# EAGLE board Tiny_Programmer-Panel-v13 (EAGLE 6.5.0), part 1 of 2
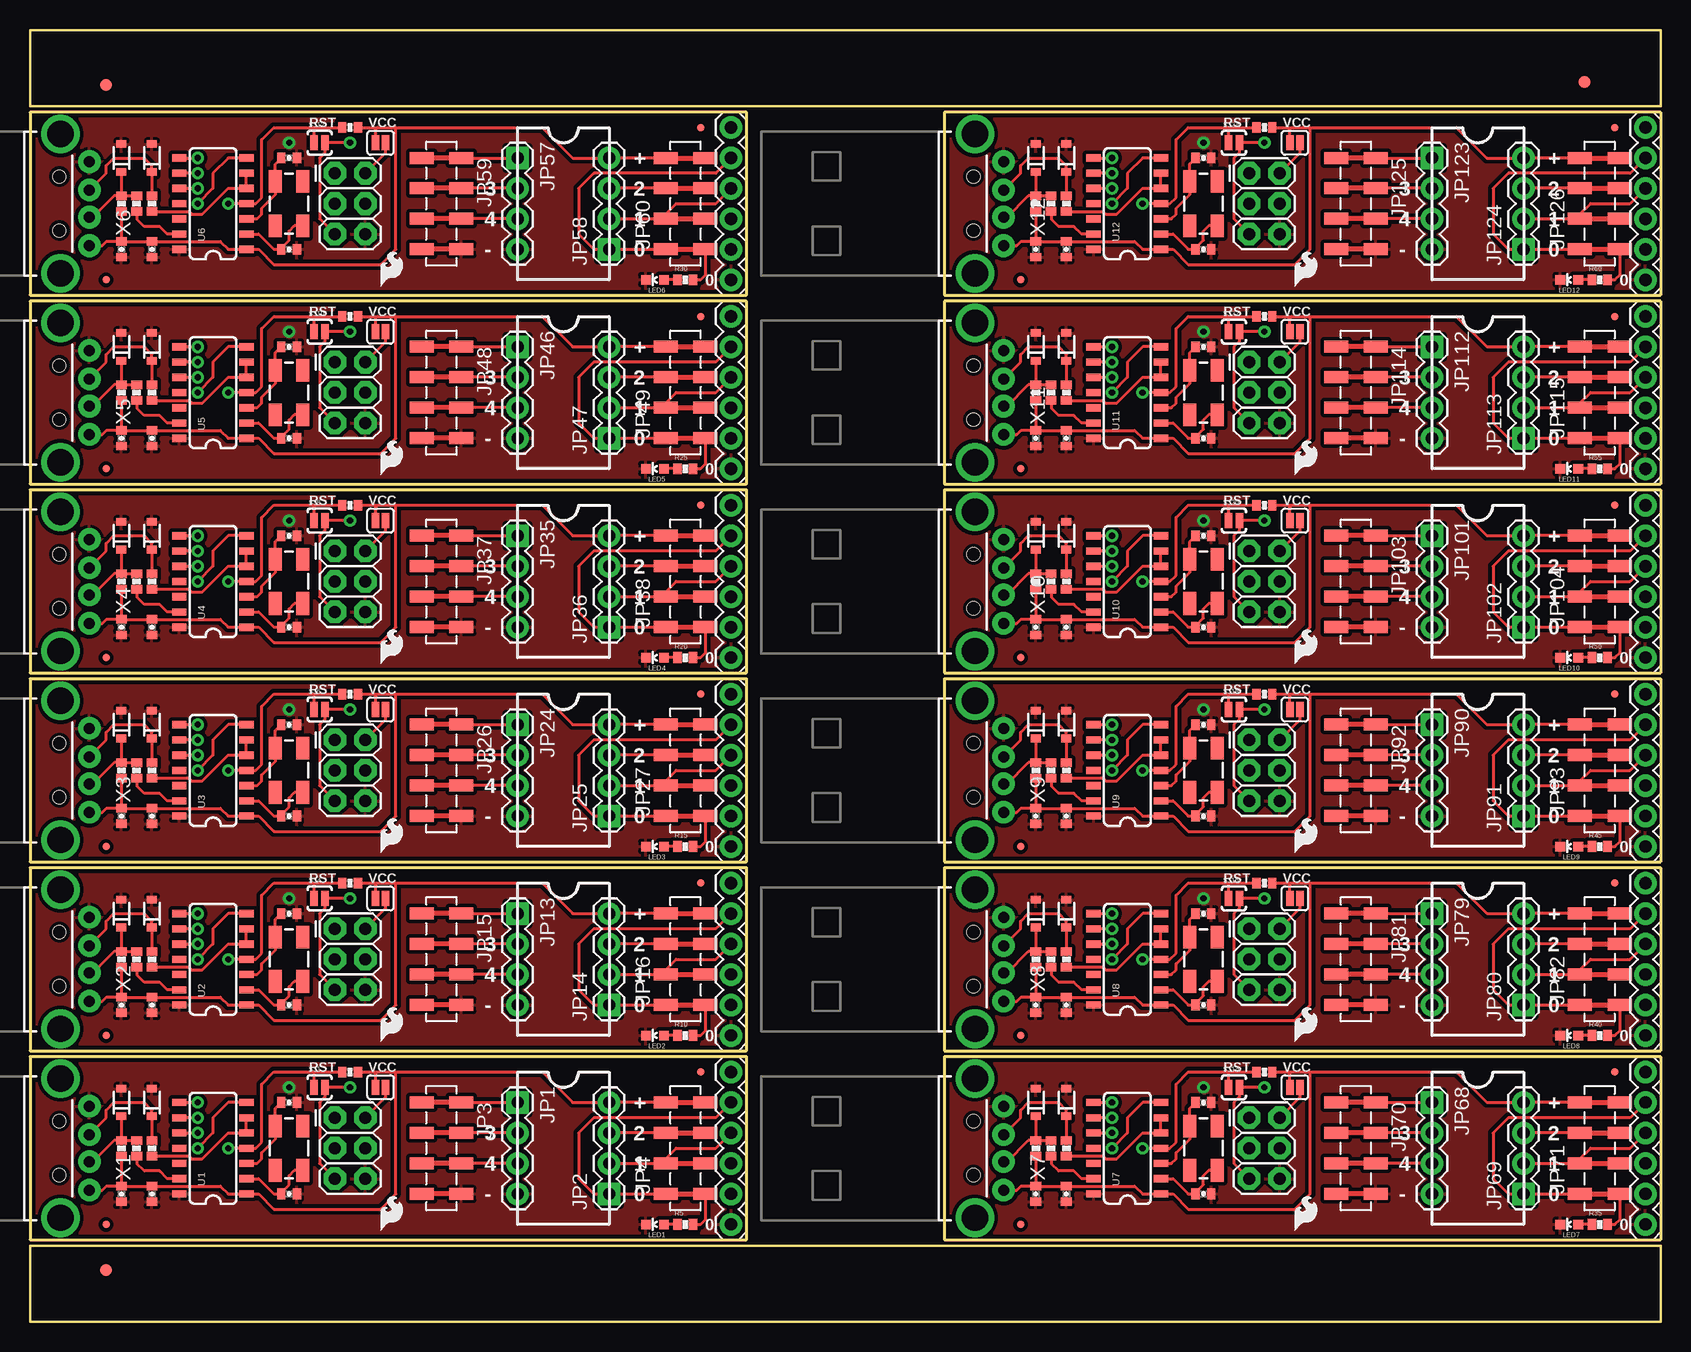
[diagram p0: board, top side]
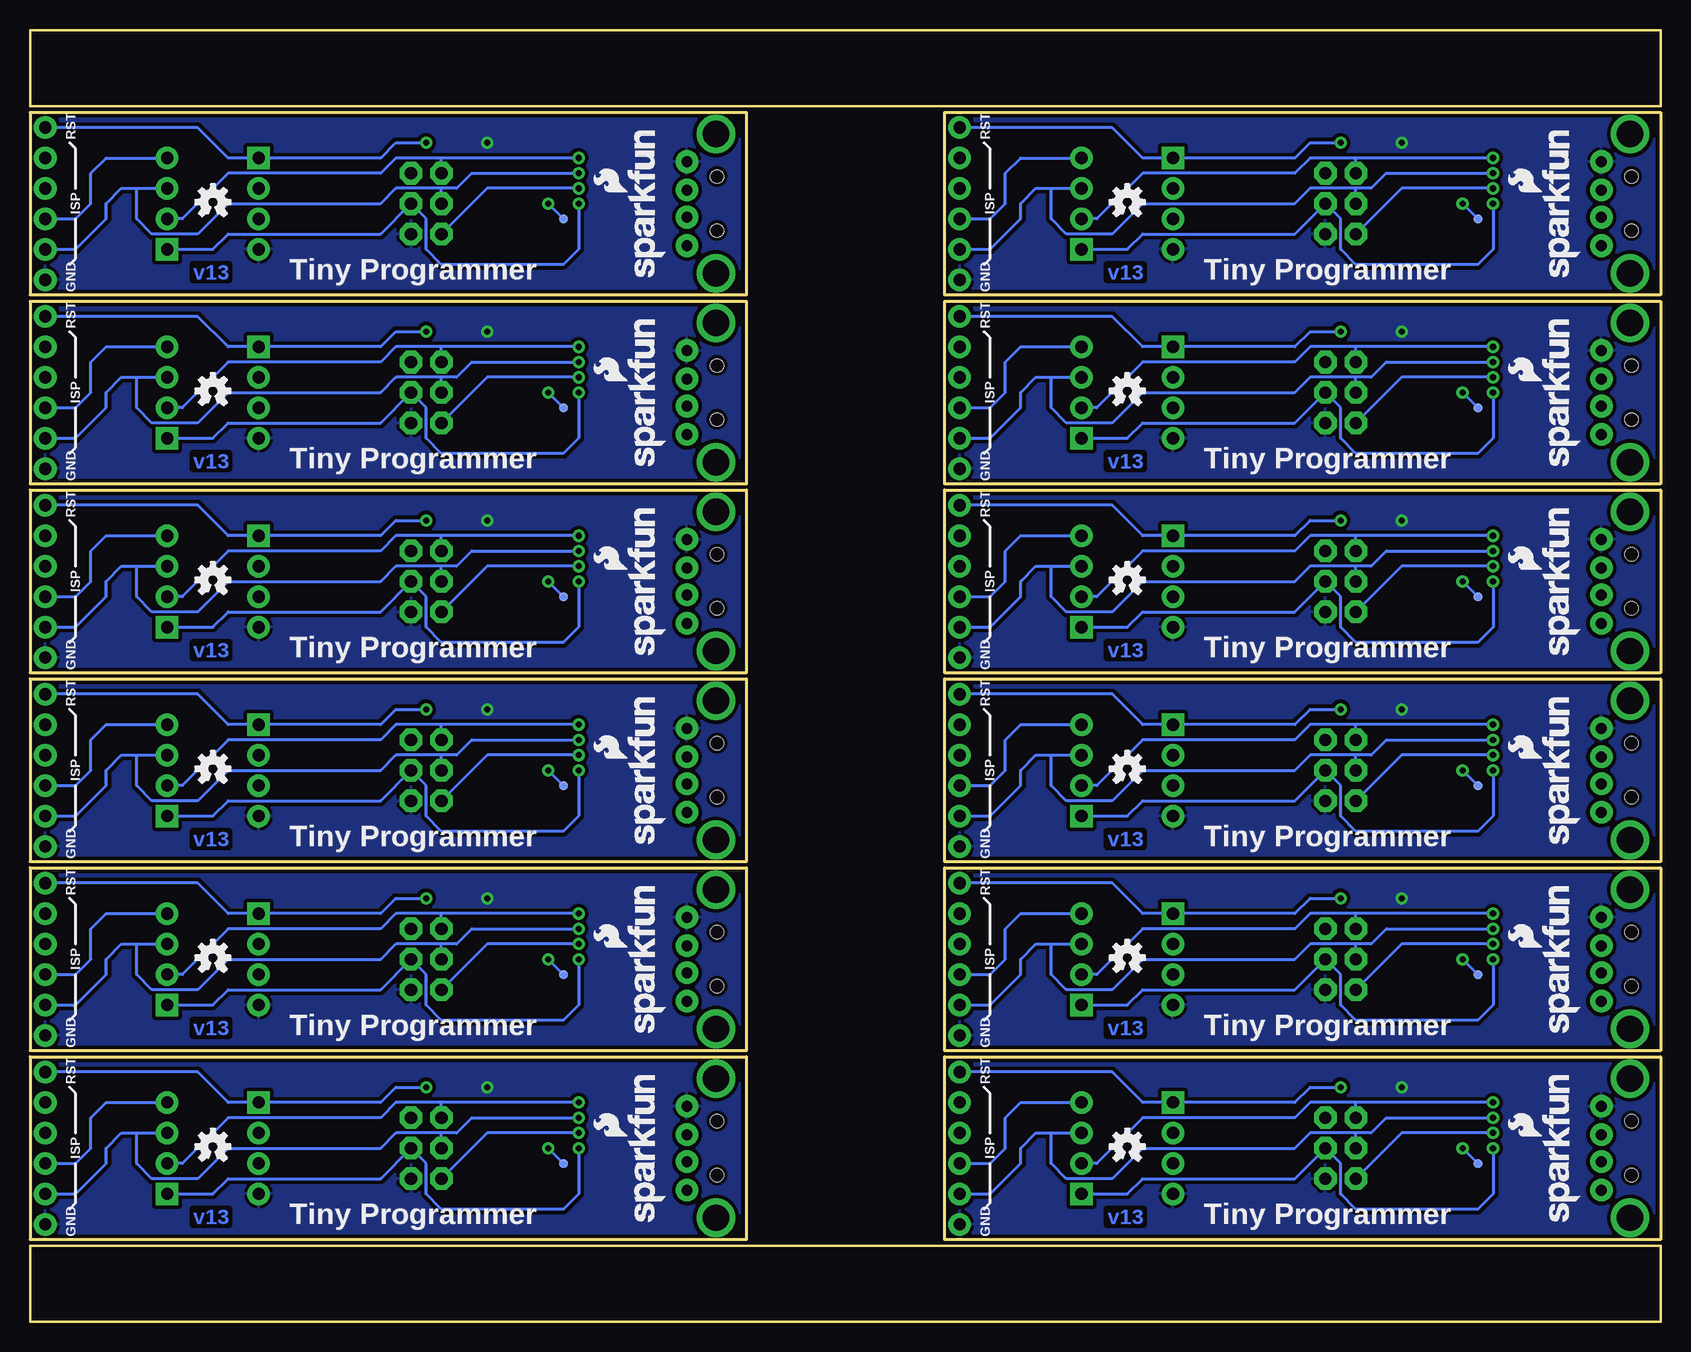
[diagram p1: board, bottom side, seen from below]

Size 135.89 x 107.7 mm. Coordinates in mm from the lower left corner, seen from the top.
Outline: 0,6.86 59.69,6.86 59.69,22.1 0,22.1 0,6.86
Outline: 0,22.61 59.69,22.61 59.69,37.85 0,37.85 0,22.61
Outline: 0,38.35 59.69,38.35 59.69,53.59 0,53.59 0,38.35
Outline: 0,54.1 59.69,54.1 59.69,69.34 0,69.34 0,54.1
Outline: 0,69.85 59.69,69.85 59.69,85.09 0,85.09 0,69.85
Outline: 0,85.6 59.69,85.6 59.69,100.84 0,100.84 0,85.6
Outline: 76.2,6.86 135.89,6.86 135.89,22.1 76.2,22.1 76.2,6.86
Outline: 76.2,22.61 135.89,22.61 135.89,37.85 76.2,37.85 76.2,22.61
Outline: 76.2,38.35 135.89,38.35 135.89,53.59 76.2,53.59 76.2,38.35
Outline: 76.2,54.1 135.89,54.1 135.89,69.34 76.2,69.34 76.2,54.1
Outline: 76.2,69.85 135.89,69.85 135.89,85.09 76.2,85.09 76.2,69.85
Outline: 76.2,85.6 135.89,85.6 135.89,100.84 76.2,100.84 76.2,85.6
Outline: 0,0 135.89,0 135.89,6.35 0,6.35 0,0
Outline: 135.89,107.7 0,107.7 0,101.35 135.89,101.35 135.89,107.7
Copper layers (1*16): Top 0.035mm / dielectric 1.5mm / Bottom 0.035mm
Design rules "default": minimum track width 8mil, minimum drill 20mil, track to track 8mil, track to pad 8mil, pad to pad 8mil, via to via 8mil, smd to smd 8mil, copper to edge 8mil, drill to drill 8mil, minimum pad ring 12mil, minimum via ring 10mil, stop-mask expansion 4mil, vias tented up to drill 20mil, thermal gap 10mil

## Footprints (pad centres in the part's own frame; a part is rotated, then mirrored left to right if it is on the bottom)
0402-CAP = smd 0.7 x 0.9: 1 -0.65,0; 2 0.65,0
SOD-323 = smd 0.63 x 0.83: 1 -1.15,0; 2 1.15,0
FIDUCIAL-1X2 = smd 1 x 1: 1 0,0
1X04 = drill 1.016 pad 1.88 square: 1 0,0 | drill 1.016 pad 1.88: 2 2.54,0; 3 5.08,0; 4 7.62,0
1X04_SMD_STRAIGHT_COMBO = smd 1 x 2: 1 0,-1.65; 1-2 0,1.65; 2 2.54,1.65; 2-2 2.54,-1.65; 3 5.08,-1.65; 3-2 5.08,1.65; 4 7.62,1.65; 4-2 7.62,-1.65
MICRO-FIDUCIAL = smd 0.635 x 0.635: 1 0,0
2X3 = drill 1.016 pad 1.88 octagon: 1 0,0; 2 0,2.54; 3 2.54,0; 4 2.54,2.54; 5 5.08,0; 6 5.08,2.54
1X06 = drill 1.016 pad 1.88: 1 0,0; 2 2.54,0; 3 5.08,0; 4 7.62,0; 5 10.16,0; 6 12.7,0
LED-0603 = smd 0.8 x 0.8: A 0,-0.75; C 0,0.75
CRYSTAL-SMD-5X3 = smd 1.9 x 1.1: 1 -1.85,-1.15; 2 1.85,-1.15; 3 1.85,1.15; 4 -1.85,1.15
0402-RES = smd 0.7 x 0.9: 1 -0.65,0; 2 0.65,0
SJ_2S-NO = smd 0.635 x 1.27: 1 -0.45,0; 2 0.45,0
SJ_2S = smd 0.635 x 1.27: 1 -0.412,0; 2 0.412,0
PAD.03X.03 = smd 0.762 x 0.762: P$1 0,0
SO14 = smd 0.6 x 1.2: 1 -3.81,-2.8; 2 -2.54,-2.8; 3 -1.27,-2.8; 4 0,-2.8; 5 1.27,-2.8; 6 2.54,-2.8; 7 3.81,-2.8; 8 3.81,2.8; 9 2.54,2.8; 10 1.27,2.8; 11 0,2.8; 12 -1.27,2.8; 13 -2.54,2.8; 14 -3.81,2.8
USB-A-H = drill 0.914 pad 1.88: D+ 2.4,1.127; D- 2.4,-1.127; GND 2.4,3.5; VBUS 2.4,-3.5 | drill 2.2: GND2 0,-5.8; GND3 0,5.8 | hole 1.1: -0.1,2.25; -0.1,-2.25

## Placement (x,y rotation side)
C1  0.1uF  [0402-CAP]  7.62,10.67 270 top
C2  18pF  [0402-CAP]  21.59,18.29 0 top
C3  10uF  [0402-CAP]  10.16,10.67 270 top
C4  18pF  [0402-CAP]  21.59,10.67 0 top
C5  0.1uF  [0402-CAP]  7.62,26.42 270 top
C6  10uF  [0402-CAP]  10.16,26.42 270 top
C7  18pF  [0402-CAP]  21.59,34.04 0 top
C8  18pF  [0402-CAP]  21.59,26.42 0 top
C9  0.1uF  [0402-CAP]  7.62,42.16 270 top
C10  10uF  [0402-CAP]  10.16,42.16 270 top
C11  18pF  [0402-CAP]  21.59,49.78 0 top
C12  18pF  [0402-CAP]  21.59,42.16 0 top
C13  0.1uF  [0402-CAP]  7.62,57.91 270 top
C14  10uF  [0402-CAP]  10.16,57.91 270 top
C15  18pF  [0402-CAP]  21.59,65.53 0 top
C16  18pF  [0402-CAP]  21.59,57.91 0 top
C17  0.1uF  [0402-CAP]  7.62,73.66 270 top
C18  10uF  [0402-CAP]  10.16,73.66 270 top
C19  18pF  [0402-CAP]  21.59,81.28 0 top
C20  18pF  [0402-CAP]  21.59,73.66 0 top
C21  0.1uF  [0402-CAP]  7.62,89.41 270 top
C22  10uF  [0402-CAP]  10.16,89.41 270 top
C23  18pF  [0402-CAP]  21.59,97.03 0 top
C24  18pF  [0402-CAP]  21.59,89.41 0 top
C25  0.1uF  [0402-CAP]  83.82,10.67 270 top
C26  10uF  [0402-CAP]  86.36,10.67 270 top
C27  18pF  [0402-CAP]  97.79,18.29 0 top
C28  18pF  [0402-CAP]  97.79,10.67 0 top
C29  0.1uF  [0402-CAP]  83.82,26.42 270 top
C30  10uF  [0402-CAP]  86.36,26.42 270 top
C31  18pF  [0402-CAP]  97.79,34.04 0 top
C32  18pF  [0402-CAP]  97.79,26.42 0 top
C33  0.1uF  [0402-CAP]  83.82,42.16 270 top
C34  10uF  [0402-CAP]  86.36,42.16 270 top
C35  18pF  [0402-CAP]  97.79,49.78 0 top
C36  18pF  [0402-CAP]  97.79,42.16 0 top
C37  0.1uF  [0402-CAP]  83.82,57.91 270 top
C38  10uF  [0402-CAP]  86.36,57.91 270 top
C39  18pF  [0402-CAP]  97.79,65.53 0 top
C40  18pF  [0402-CAP]  97.79,57.91 0 top
C41  0.1uF  [0402-CAP]  83.82,73.66 270 top
C42  10uF  [0402-CAP]  86.36,73.66 270 top
C43  18pF  [0402-CAP]  97.79,81.28 0 top
C44  18pF  [0402-CAP]  97.79,73.66 0 top
C45  0.1uF  [0402-CAP]  83.82,89.41 270 top
C46  10uF  [0402-CAP]  86.36,89.41 270 top
C47  18pF  [0402-CAP]  97.79,97.03 0 top
C48  18pF  [0402-CAP]  97.79,89.41 0 top
D1  3.3V  [SOD-323]  10.16,18.29 90 top
D2  3.3V  [SOD-323]  7.62,18.29 90 top
D3  3.3V  [SOD-323]  10.16,34.04 90 top
D4  3.3V  [SOD-323]  7.62,34.04 90 top
D5  3.3V  [SOD-323]  10.16,49.78 90 top
D6  3.3V  [SOD-323]  7.62,49.78 90 top
D7  3.3V  [SOD-323]  10.16,65.53 90 top
D8  3.3V  [SOD-323]  7.62,65.53 90 top
D9  3.3V  [SOD-323]  10.16,81.28 90 top
D10  3.3V  [SOD-323]  7.62,81.28 90 top
D11  3.3V  [SOD-323]  10.16,97.03 90 top
D12  3.3V  [SOD-323]  7.62,97.03 90 top
D13  3.3V  [SOD-323]  86.36,18.29 90 top
D14  3.3V  [SOD-323]  83.82,18.29 90 top
D15  3.3V  [SOD-323]  86.36,34.04 90 top
D16  3.3V  [SOD-323]  83.82,34.04 90 top
D17  3.3V  [SOD-323]  86.36,49.78 90 top
D18  3.3V  [SOD-323]  83.82,49.78 90 top
D19  3.3V  [SOD-323]  86.36,65.53 90 top
D20  3.3V  [SOD-323]  83.82,65.53 90 top
D21  3.3V  [SOD-323]  86.36,81.28 90 top
D22  3.3V  [SOD-323]  83.82,81.28 90 top
D23  3.3V  [SOD-323]  86.36,97.03 90 top
D24  3.3V  [SOD-323]  83.82,97.03 90 top
E$1  [FIDUCIAL-1X2]  6.35,4.32 270 top
E$3  [FIDUCIAL-1X2]  129.54,103.38 90 top
E$4  [FIDUCIAL-1X2]  6.35,103.12 270 top
JP1  [1X04]  40.64,18.29 270 top
JP2  [1X04]  48.26,10.67 90 top
JP3  [1X04_SMD_STRAIGHT_COMBO]  34.29,18.29 270 top
JP4  [1X04_SMD_STRAIGHT_COMBO]  54.61,10.67 90 top
JP5  LOGO-SFENW2  [SFE-NEW-WEB]  6.73,8.38 90 bottom
JP6  LOGO-SFESK  [SFE-LOGO-FLAME]  29.21,7.62 0 top
JP7  FIDUCIALUFIDUCIAL  [MICRO-FIDUCIAL]  6.35,8.13 0 top
JP8  FIDUCIALUFIDUCIAL  [MICRO-FIDUCIAL]  55.88,20.83 0 top
JP9  [2X3]  25.4,17.02 270 top
JP10  [2X3]  25.4,32.77 270 top
JP11  LOGO-SFESK  [SFE-LOGO-FLAME]  9.91,15.49 90 bottom
JP12  [1X06]  58.42,20.83 270 top
JP13  [1X04]  40.64,34.04 270 top
JP14  [1X04]  48.26,26.42 90 top
JP15  [1X04_SMD_STRAIGHT_COMBO]  34.29,34.04 270 top
JP16  [1X04_SMD_STRAIGHT_COMBO]  54.61,26.42 90 top
JP17  LOGO-SFENW2  [SFE-NEW-WEB]  6.73,24.13 90 bottom
JP18  LOGO-SFESK  [SFE-LOGO-FLAME]  29.21,23.37 0 top
JP19  FIDUCIALUFIDUCIAL  [MICRO-FIDUCIAL]  6.35,23.88 0 top
JP20  FIDUCIALUFIDUCIAL  [MICRO-FIDUCIAL]  55.88,36.58 0 top
JP21  LOGO-SFESK  [SFE-LOGO-FLAME]  9.91,31.24 90 bottom
JP22  [1X06]  58.42,36.58 270 top
JP23  [2X3]  25.4,48.51 270 top
JP24  [1X04]  40.64,49.78 270 top
JP25  [1X04]  48.26,42.16 90 top
JP26  [1X04_SMD_STRAIGHT_COMBO]  34.29,49.78 270 top
JP27  [1X04_SMD_STRAIGHT_COMBO]  54.61,42.16 90 top
JP28  LOGO-SFENW2  [SFE-NEW-WEB]  6.73,39.88 90 bottom
JP29  LOGO-SFESK  [SFE-LOGO-FLAME]  29.21,39.12 0 top
JP30  FIDUCIALUFIDUCIAL  [MICRO-FIDUCIAL]  6.35,39.62 0 top
JP31  FIDUCIALUFIDUCIAL  [MICRO-FIDUCIAL]  55.88,52.32 0 top
JP32  LOGO-SFESK  [SFE-LOGO-FLAME]  9.91,46.99 90 bottom
JP33  [1X06]  58.42,52.32 270 top
JP34  [2X3]  25.4,64.26 270 top
JP35  [1X04]  40.64,65.53 270 top
JP36  [1X04]  48.26,57.91 90 top
JP37  [1X04_SMD_STRAIGHT_COMBO]  34.29,65.53 270 top
JP38  [1X04_SMD_STRAIGHT_COMBO]  54.61,57.91 90 top
JP39  LOGO-SFENW2  [SFE-NEW-WEB]  6.73,55.63 90 bottom
JP40  LOGO-SFESK  [SFE-LOGO-FLAME]  29.21,54.86 0 top
JP41  FIDUCIALUFIDUCIAL  [MICRO-FIDUCIAL]  6.35,55.37 0 top
JP42  FIDUCIALUFIDUCIAL  [MICRO-FIDUCIAL]  55.88,68.07 0 top
JP43  LOGO-SFESK  [SFE-LOGO-FLAME]  9.91,62.74 90 bottom
JP44  [1X06]  58.42,68.07 270 top
JP45  [2X3]  25.4,80.01 270 top
JP46  [1X04]  40.64,81.28 270 top
JP47  [1X04]  48.26,73.66 90 top
JP48  [1X04_SMD_STRAIGHT_COMBO]  34.29,81.28 270 top
JP49  [1X04_SMD_STRAIGHT_COMBO]  54.61,73.66 90 top
JP50  LOGO-SFENW2  [SFE-NEW-WEB]  6.73,71.37 90 bottom
JP51  LOGO-SFESK  [SFE-LOGO-FLAME]  29.21,70.61 0 top
JP52  FIDUCIALUFIDUCIAL  [MICRO-FIDUCIAL]  6.35,71.12 0 top
JP53  FIDUCIALUFIDUCIAL  [MICRO-FIDUCIAL]  55.88,83.82 0 top
JP54  LOGO-SFESK  [SFE-LOGO-FLAME]  9.91,78.49 90 bottom
JP55  [1X06]  58.42,83.82 270 top
JP56  [2X3]  25.4,95.76 270 top
JP57  [1X04]  40.64,97.03 270 top
JP58  [1X04]  48.26,89.41 90 top
JP59  [1X04_SMD_STRAIGHT_COMBO]  34.29,97.03 270 top
JP60  [1X04_SMD_STRAIGHT_COMBO]  54.61,89.41 90 top
JP61  LOGO-SFENW2  [SFE-NEW-WEB]  6.73,87.12 90 bottom
JP62  LOGO-SFESK  [SFE-LOGO-FLAME]  29.21,86.36 0 top
JP63  FIDUCIALUFIDUCIAL  [MICRO-FIDUCIAL]  6.35,86.87 0 top
JP64  FIDUCIALUFIDUCIAL  [MICRO-FIDUCIAL]  55.88,99.57 0 top
JP65  LOGO-SFESK  [SFE-LOGO-FLAME]  9.91,94.23 90 bottom
JP66  [1X06]  58.42,99.57 270 top
JP67  [2X3]  101.6,17.02 270 top
JP68  [1X04]  116.84,18.29 270 top
JP69  [1X04]  124.46,10.67 90 top
JP70  [1X04_SMD_STRAIGHT_COMBO]  110.49,18.29 270 top
JP71  [1X04_SMD_STRAIGHT_COMBO]  130.81,10.67 90 top
JP72  LOGO-SFENW2  [SFE-NEW-WEB]  82.93,8.38 90 bottom
JP73  LOGO-SFESK  [SFE-LOGO-FLAME]  105.41,7.62 0 top
JP74  FIDUCIALUFIDUCIAL  [MICRO-FIDUCIAL]  82.55,8.13 0 top
JP75  FIDUCIALUFIDUCIAL  [MICRO-FIDUCIAL]  132.08,20.83 0 top
JP76  LOGO-SFESK  [SFE-LOGO-FLAME]  86.11,15.49 90 bottom
JP77  [1X06]  134.62,20.83 270 top
JP78  [2X3]  101.6,32.77 270 top
JP79  [1X04]  116.84,34.04 270 top
JP80  [1X04]  124.46,26.42 90 top
JP81  [1X04_SMD_STRAIGHT_COMBO]  110.49,34.04 270 top
JP82  [1X04_SMD_STRAIGHT_COMBO]  130.81,26.42 90 top
JP83  LOGO-SFENW2  [SFE-NEW-WEB]  82.93,24.13 90 bottom
JP84  LOGO-SFESK  [SFE-LOGO-FLAME]  105.41,23.37 0 top
JP85  FIDUCIALUFIDUCIAL  [MICRO-FIDUCIAL]  82.55,23.88 0 top
JP86  FIDUCIALUFIDUCIAL  [MICRO-FIDUCIAL]  132.08,36.58 0 top
JP87  LOGO-SFESK  [SFE-LOGO-FLAME]  86.11,31.24 90 bottom
JP88  [1X06]  134.62,36.58 270 top
JP89  [2X3]  101.6,48.51 270 top
JP90  [1X04]  116.84,49.78 270 top
JP91  [1X04]  124.46,42.16 90 top
JP92  [1X04_SMD_STRAIGHT_COMBO]  110.49,49.78 270 top
JP93  [1X04_SMD_STRAIGHT_COMBO]  130.81,42.16 90 top
JP94  LOGO-SFENW2  [SFE-NEW-WEB]  82.93,39.88 90 bottom
JP95  LOGO-SFESK  [SFE-LOGO-FLAME]  105.41,39.12 0 top
JP96  FIDUCIALUFIDUCIAL  [MICRO-FIDUCIAL]  82.55,39.62 0 top
JP97  FIDUCIALUFIDUCIAL  [MICRO-FIDUCIAL]  132.08,52.32 0 top
JP98  LOGO-SFESK  [SFE-LOGO-FLAME]  86.11,46.99 90 bottom
JP99  [1X06]  134.62,52.32 270 top
JP100  [2X3]  101.6,64.26 270 top
JP101  [1X04]  116.84,65.53 270 top
JP102  [1X04]  124.46,57.91 90 top
JP103  [1X04_SMD_STRAIGHT_COMBO]  110.49,65.53 270 top
JP104  [1X04_SMD_STRAIGHT_COMBO]  130.81,57.91 90 top
JP105  LOGO-SFENW2  [SFE-NEW-WEB]  82.93,55.63 90 bottom
JP106  LOGO-SFESK  [SFE-LOGO-FLAME]  105.41,54.86 0 top
JP107  FIDUCIALUFIDUCIAL  [MICRO-FIDUCIAL]  82.55,55.37 0 top
JP108  FIDUCIALUFIDUCIAL  [MICRO-FIDUCIAL]  132.08,68.07 0 top
JP109  LOGO-SFESK  [SFE-LOGO-FLAME]  86.11,62.74 90 bottom
JP110  [1X06]  134.62,68.07 270 top
JP111  [2X3]  101.6,80.01 270 top
JP112  [1X04]  116.84,81.28 270 top
JP113  [1X04]  124.46,73.66 90 top
JP114  [1X04_SMD_STRAIGHT_COMBO]  110.49,81.28 270 top
JP115  [1X04_SMD_STRAIGHT_COMBO]  130.81,73.66 90 top
JP116  LOGO-SFENW2  [SFE-NEW-WEB]  82.93,71.37 90 bottom
JP117  LOGO-SFESK  [SFE-LOGO-FLAME]  105.41,70.61 0 top
JP118  FIDUCIALUFIDUCIAL  [MICRO-FIDUCIAL]  82.55,71.12 0 top
JP119  FIDUCIALUFIDUCIAL  [MICRO-FIDUCIAL]  132.08,83.82 0 top
JP120  LOGO-SFESK  [SFE-LOGO-FLAME]  86.11,78.49 90 bottom
JP121  [1X06]  134.62,83.82 270 top
JP122  [2X3]  101.6,95.76 270 top
JP123  [1X04]  116.84,97.03 270 top
JP124  [1X04]  124.46,89.41 90 top
JP125  [1X04_SMD_STRAIGHT_COMBO]  110.49,97.03 270 top
JP126  [1X04_SMD_STRAIGHT_COMBO]  130.81,89.41 90 top
JP127  LOGO-SFENW2  [SFE-NEW-WEB]  82.93,87.12 90 bottom
JP128  LOGO-SFESK  [SFE-LOGO-FLAME]  105.41,86.36 0 top
JP129  FIDUCIALUFIDUCIAL  [MICRO-FIDUCIAL]  82.55,86.87 0 top
JP130  FIDUCIALUFIDUCIAL  [MICRO-FIDUCIAL]  132.08,99.57 0 top
JP131  LOGO-SFESK  [SFE-LOGO-FLAME]  86.11,94.23 90 bottom
JP132  [1X06]  134.62,99.57 270 top
LED1  Yellow  [LED-0603]  52.07,8.13 90 top
LED2  Yellow  [LED-0603]  52.07,23.88 90 top
LED3  Yellow  [LED-0603]  52.07,39.62 90 top
LED4  Yellow  [LED-0603]  52.07,55.37 90 top
LED5  Yellow  [LED-0603]  52.07,71.12 90 top
LED6  Yellow  [LED-0603]  52.07,86.87 90 top
LED7  Yellow  [LED-0603]  128.27,8.13 90 top
LED8  Yellow  [LED-0603]  128.27,23.88 90 top
LED9  Yellow  [LED-0603]  128.27,39.62 90 top
LED10  Yellow  [LED-0603]  128.27,55.37 90 top
LED11  Yellow  [LED-0603]  128.27,71.12 90 top
LED12  Yellow  [LED-0603]  128.27,86.87 90 top
Q1  16MHz  [CRYSTAL-SMD-5X3]  21.59,14.48 90 top
Q2  16MHz  [CRYSTAL-SMD-5X3]  21.59,30.23 90 top
Q3  16MHz  [CRYSTAL-SMD-5X3]  21.59,45.97 90 top
Q4  16MHz  [CRYSTAL-SMD-5X3]  21.59,61.72 90 top
Q5  16MHz  [CRYSTAL-SMD-5X3]  21.59,77.47 90 top
Q6  16MHz  [CRYSTAL-SMD-5X3]  21.59,93.22 90 top
Q7  16MHz  [CRYSTAL-SMD-5X3]  97.79,14.48 90 top
Q8  16MHz  [CRYSTAL-SMD-5X3]  97.79,30.23 90 top
Q9  16MHz  [CRYSTAL-SMD-5X3]  97.79,45.97 90 top
Q10  16MHz  [CRYSTAL-SMD-5X3]  97.79,61.72 90 top
Q11  16MHz  [CRYSTAL-SMD-5X3]  97.79,77.47 90 top
Q12  16MHz  [CRYSTAL-SMD-5X3]  97.79,93.22 90 top
R1  68  [0402-RES]  8.89,14.48 270 top
R2  68  [0402-RES]  10.16,14.48 270 top
R3  1.5K  [0402-RES]  7.62,14.48 270 top
R4  10k  [0402-RES]  26.67,20.83 0 top
R5  330  [0402-RES]  54.61,8.13 0 top
R6  68  [0402-RES]  8.89,30.23 270 top
R7  68  [0402-RES]  10.16,30.23 270 top
R8  1.5K  [0402-RES]  7.62,30.23 270 top
R9  10k  [0402-RES]  26.67,36.58 0 top
R10  330  [0402-RES]  54.61,23.88 0 top
R11  68  [0402-RES]  8.89,45.97 270 top
R12  68  [0402-RES]  10.16,45.97 270 top
R13  1.5K  [0402-RES]  7.62,45.97 270 top
R14  10k  [0402-RES]  26.67,52.32 0 top
R15  330  [0402-RES]  54.61,39.62 0 top
R16  68  [0402-RES]  8.89,61.72 270 top
R17  68  [0402-RES]  10.16,61.72 270 top
R18  1.5K  [0402-RES]  7.62,61.72 270 top
R19  10k  [0402-RES]  26.67,68.07 0 top
R20  330  [0402-RES]  54.61,55.37 0 top
R21  68  [0402-RES]  8.89,77.47 270 top
R22  68  [0402-RES]  10.16,77.47 270 top
R23  1.5K  [0402-RES]  7.62,77.47 270 top
R24  10k  [0402-RES]  26.67,83.82 0 top
R25  330  [0402-RES]  54.61,71.12 0 top
R26  68  [0402-RES]  8.89,93.22 270 top
R27  68  [0402-RES]  10.16,93.22 270 top
R28  1.5K  [0402-RES]  7.62,93.22 270 top
R29  10k  [0402-RES]  26.67,99.57 0 top
R30  330  [0402-RES]  54.61,86.87 0 top
R31  68  [0402-RES]  85.09,14.48 270 top
R32  68  [0402-RES]  86.36,14.48 270 top
R33  1.5K  [0402-RES]  83.82,14.48 270 top
R34  10k  [0402-RES]  102.87,20.83 0 top
R35  330  [0402-RES]  130.81,8.13 0 top
R36  68  [0402-RES]  85.09,30.23 270 top
R37  68  [0402-RES]  86.36,30.23 270 top
R38  1.5K  [0402-RES]  83.82,30.23 270 top
R39  10k  [0402-RES]  102.87,36.58 0 top
R40  330  [0402-RES]  130.81,23.88 0 top
R41  68  [0402-RES]  85.09,45.97 270 top
R42  68  [0402-RES]  86.36,45.97 270 top
R43  1.5K  [0402-RES]  83.82,45.97 270 top
R44  10k  [0402-RES]  102.87,52.32 0 top
R45  330  [0402-RES]  130.81,39.62 0 top
R46  68  [0402-RES]  85.09,61.72 270 top
R47  68  [0402-RES]  86.36,61.72 270 top
R48  1.5K  [0402-RES]  83.82,61.72 270 top
R49  10k  [0402-RES]  102.87,68.07 0 top
R50  330  [0402-RES]  130.81,55.37 0 top
R51  68  [0402-RES]  85.09,77.47 270 top
R52  68  [0402-RES]  86.36,77.47 270 top
R53  1.5K  [0402-RES]  83.82,77.47 270 top
R54  10k  [0402-RES]  102.87,83.82 0 top
R55  330  [0402-RES]  130.81,71.12 0 top
R56  68  [0402-RES]  85.09,93.22 270 top
R57  68  [0402-RES]  86.36,93.22 270 top
R58  1.5K  [0402-RES]  83.82,93.22 270 top
R59  10k  [0402-RES]  102.87,99.57 0 top
R60  330  [0402-RES]  130.81,86.87 0 top
SJ1  SOLDERJUMPERNO  [SJ_2S-NO]  24.13,19.56 0 top
SJ2  NC  [SJ_2S]  29.21,19.56 0 top
SJ3  NC  [SJ_2S]  29.21,35.31 0 top
SJ4  SOLDERJUMPERNO  [SJ_2S-NO]  24.13,35.31 0 top
SJ5  NC  [SJ_2S]  29.21,51.05 0 top
SJ6  SOLDERJUMPERNO  [SJ_2S-NO]  24.13,51.05 0 top
SJ7  NC  [SJ_2S]  29.21,66.8 0 top
SJ8  SOLDERJUMPERNO  [SJ_2S-NO]  24.13,66.8 0 top
SJ9  NC  [SJ_2S]  29.21,82.55 0 top
SJ10  SOLDERJUMPERNO  [SJ_2S-NO]  24.13,82.55 0 top
SJ11  NC  [SJ_2S]  29.21,98.3 0 top
SJ12  SOLDERJUMPERNO  [SJ_2S-NO]  24.13,98.3 0 top
SJ13  NC  [SJ_2S]  105.41,19.56 0 top
SJ14  SOLDERJUMPERNO  [SJ_2S-NO]  100.33,19.56 0 top
SJ15  NC  [SJ_2S]  105.41,35.31 0 top
SJ16  SOLDERJUMPERNO  [SJ_2S-NO]  100.33,35.31 0 top
SJ17  NC  [SJ_2S]  105.41,51.05 0 top
SJ18  SOLDERJUMPERNO  [SJ_2S-NO]  100.33,51.05 0 top
SJ19  NC  [SJ_2S]  105.41,66.8 0 top
SJ20  SOLDERJUMPERNO  [SJ_2S-NO]  100.33,66.8 0 top
SJ21  NC  [SJ_2S]  105.41,82.55 0 top
SJ22  SOLDERJUMPERNO  [SJ_2S-NO]  100.33,82.55 0 top
SJ23  NC  [SJ_2S]  105.41,98.3 0 top
SJ24  SOLDERJUMPERNO  [SJ_2S-NO]  100.33,98.3 0 top
TP1  TEST-POINT3  [PAD.03X.03]  15.24,13.21 0 bottom
TP2  TEST-POINT3  [PAD.03X.03]  15.24,28.96 0 bottom
TP3  TEST-POINT3  [PAD.03X.03]  15.24,44.7 0 bottom
TP4  TEST-POINT3  [PAD.03X.03]  15.24,60.45 0 bottom
TP5  TEST-POINT3  [PAD.03X.03]  15.24,76.2 0 bottom
TP6  TEST-POINT3  [PAD.03X.03]  15.24,91.95 0 bottom
TP7  TEST-POINT3  [PAD.03X.03]  91.44,13.21 0 bottom
TP8  TEST-POINT3  [PAD.03X.03]  91.44,28.96 0 bottom
TP9  TEST-POINT3  [PAD.03X.03]  91.44,44.7 0 bottom
TP10  TEST-POINT3  [PAD.03X.03]  91.44,60.45 0 bottom
TP11  TEST-POINT3  [PAD.03X.03]  91.44,76.2 0 bottom
TP12  TEST-POINT3  [PAD.03X.03]  91.44,91.95 0 bottom
U1  ATTINY84  [SO14]  15.24,14.48 90 top
U2  ATTINY84  [SO14]  15.24,30.23 90 top
U3  ATTINY84  [SO14]  15.24,45.97 90 top
U4  ATTINY84  [SO14]  15.24,61.72 90 top
U5  ATTINY84  [SO14]  15.24,77.47 90 top
U6  ATTINY84  [SO14]  15.24,93.22 90 top
U7  ATTINY84  [SO14]  91.44,14.48 90 top
U8  ATTINY84  [SO14]  91.44,30.23 90 top
U9  ATTINY84  [SO14]  91.44,45.97 90 top
U10  ATTINY84  [SO14]  91.44,61.72 90 top
U11  ATTINY84  [SO14]  91.44,77.47 90 top
U12  ATTINY84  [SO14]  91.44,93.22 90 top
U$1  OSHW-LOGOS  [OSHW-LOGO-S]  44.45,14.61 0 bottom
U$2  OSHW-LOGOS  [OSHW-LOGO-S]  44.45,30.35 0 bottom
U$3  OSHW-LOGOS  [OSHW-LOGO-S]  44.45,46.1 0 bottom
U$4  OSHW-LOGOS  [OSHW-LOGO-S]  44.45,61.85 0 bottom
U$5  OSHW-LOGOS  [OSHW-LOGO-S]  44.45,77.6 0 bottom
U$6  OSHW-LOGOS  [OSHW-LOGO-S]  44.45,93.34 0 bottom
U$7  OSHW-LOGOS  [OSHW-LOGO-S]  120.65,14.61 0 bottom
U$8  OSHW-LOGOS  [OSHW-LOGO-S]  120.65,30.35 0 bottom
U$9  OSHW-LOGOS  [OSHW-LOGO-S]  120.65,46.1 0 bottom
U$10  OSHW-LOGOS  [OSHW-LOGO-S]  120.65,61.85 0 bottom
U$11  OSHW-LOGOS  [OSHW-LOGO-S]  120.65,77.6 0 bottom
U$12  OSHW-LOGOS  [OSHW-LOGO-S]  120.65,93.34 0 bottom
X1  USB-A-H  [USB-A-H]  2.54,14.48 0 top
X2  USB-A-H  [USB-A-H]  2.54,30.23 0 top
X3  USB-A-H  [USB-A-H]  2.54,45.97 0 top
X4  USB-A-H  [USB-A-H]  2.54,61.72 0 top
X5  USB-A-H  [USB-A-H]  2.54,77.47 0 top
X6  USB-A-H  [USB-A-H]  2.54,93.22 0 top
X7  USB-A-H  [USB-A-H]  78.74,14.48 0 top
X8  USB-A-H  [USB-A-H]  78.74,30.23 0 top
X9  USB-A-H  [USB-A-H]  78.74,45.97 0 top
X10  USB-A-H  [USB-A-H]  78.74,61.72 0 top
X11  USB-A-H  [USB-A-H]  78.74,77.47 0 top
X12  USB-A-H  [USB-A-H]  78.74,93.22 0 top

## Library data of the parts
C1-C48 R1-R60 SJ1-SJ24 TP1-TP12 = SparkFun-Passives
D1-D24 = SparkFun-DiscreteSemi
E$1 E$3 E$4 JP5 JP6 JP11 JP17 JP18 JP21 JP28 JP29 JP32 JP39 JP40 JP43 JP50 JP51 JP54 JP61 JP62 JP65 JP72 JP73 JP76 JP83 JP84 JP87 JP94 JP95 JP98 JP105 JP106 JP109 JP116 JP117 JP120 JP127 JP128 JP131 U$1-U$12 = SparkFun-Aesthetics
JP1-JP4 JP9 JP10 JP12-JP16 JP22-JP27 JP33-JP38 JP44-JP49 JP55-JP60 JP66-JP71 JP77-JP82 JP88-JP93 JP99-JP104 JP110-JP115 JP121-JP126 JP132 X1-X12 = SparkFun-Connectors
JP7 JP8 JP19 JP20 JP30 JP31 JP41 JP42 JP52 JP53 JP63 JP64 JP74 JP75 JP85 JP86 JP96 JP97 JP107 JP108 JP118 JP119 JP129 JP130 = SparkFun
LED1-LED12 = SparkFun-LED
Q1-Q12 = SparkFun-FreqCtrl
U1-U12 = SparkFun-DigitalIC

## Nets
1: JP13.3 JP15.3
2: JP1.2 JP3.2
3: JP1.3 JP3.3
4: JP13.2 JP15.2
5: JP24.3 JP26.3
6: JP24.2 JP26.2
7: JP35.3 JP37.3
8: JP35.2 JP37.2
9: JP46.3 JP48.3
10: JP46.2 JP48.2
11: JP57.3 JP59.3
12: JP57.2 JP59.2
13: JP68.3 JP70.3
14: JP68.2 JP70.2
15: JP79.3 JP81.3
16: JP79.2 JP81.2
17: JP90.3 JP92.3
18: JP90.2 JP92.2
19: JP101.3 JP103.3
20: JP101.2 JP103.2
21: JP112.3 JP114.3
22: JP112.2 JP114.2
23: JP123.3 JP125.3
24: JP123.2 JP125.2
D+: R2.2 U1.5 U1.6
D+1: R7.2 U2.5 U2.6
D+2: R12.2 U3.5 U3.6
D+3: R17.2 U4.5 U4.6
D+4: R22.2 U5.5 U5.6
D+5: R27.2 U6.5 U6.6
D+6: R32.2 U7.5 U7.6
D+7: R37.2 U8.5 U8.6
D+8: R42.2 U9.5 U9.6
D+9: R47.2 U10.5 U10.6
D+10: R52.2 U11.5 U11.6
D+11: R57.2 U12.5 U12.6
D-: R1.2 U1.13
D-1: R6.2 U2.13
D-2: R11.2 U3.13
D-3: R16.2 U4.13
D-4: R21.2 U5.13
D-5: R26.2 U6.13
D-6: R31.2 U7.13
D-7: R36.2 U8.13
D-8: R41.2 U9.13
D-9: R46.2 U10.13
D-10: R51.2 U11.13
D-11: R56.2 U12.13
GND: C1.2 C2.2 C3.2 C4.2 D1.2 D2.2 JP1.4 JP3.4 JP9.6 JP12.6 LED1.C U1.14 X1.GND
GND1: C5.2 C6.2 C7.2 C8.2 D3.2 D4.2 JP10.6 JP13.4 JP15.4 JP22.6 LED2.C U2.14 X2.GND
GND2: C9.2 C10.2 C11.2 C12.2 D5.2 D6.2 JP23.6 JP24.4 JP26.4 JP33.6 LED3.C U3.14 X3.GND
GND3: C13.2 C14.2 C15.2 C16.2 D7.2 D8.2 JP34.6 JP35.4 JP37.4 JP44.6 LED4.C U4.14 X4.GND
GND4: C17.2 C18.2 C19.2 C20.2 D9.2 D10.2 JP45.6 JP46.4 JP48.4 JP55.6 LED5.C U5.14 X5.GND
GND5: C21.2 C22.2 C23.2 C24.2 D11.2 D12.2 JP56.6 JP57.4 JP59.4 JP66.6 LED6.C U6.14 X6.GND
GND6: C25.2 C26.2 C27.2 C28.2 D13.2 D14.2 JP67.6 JP68.4 JP70.4 JP77.6 LED7.C U7.14 X7.GND
GND7: C29.2 C30.2 C31.2 C32.2 D15.2 D16.2 JP78.6 JP79.4 JP81.4 JP88.6 LED8.C U8.14 X8.GND
GND8: C33.2 C34.2 C35.2 C36.2 D17.2 D18.2 JP89.6 JP90.4 JP92.4 JP99.6 LED9.C U9.14 X9.GND
GND9: C37.2 C38.2 C39.2 C40.2 D19.2 D20.2 JP100.6 JP101.4 JP103.4 JP110.6 LED10.C U10.14 X10.GND
GND10: C41.2 C42.2 C43.2 C44.2 D21.2 D22.2 JP111.6 JP112.4 JP114.4 JP121.6 LED11.C U11.14 X11.GND
GND11: C45.2 C46.2 C47.2 C48.2 D23.2 D24.2 JP122.6 JP123.4 JP125.4 JP132.6 LED12.C U12.14 X12.GND
MISO: JP2.2 JP4.2 JP9.1 JP12.3 U1.8
MISO1: JP10.1 JP14.2 JP16.2 JP22.3 U2.8
MISO2: JP23.1 JP25.2 JP27.2 JP33.3 U3.8
MISO3: JP34.1 JP36.2 JP38.2 JP44.3 U4.8
MISO4: JP45.1 JP47.2 JP49.2 JP55.3 U5.8
MISO5: JP56.1 JP58.2 JP60.2 JP66.3 U6.8
MISO6: JP67.1 JP69.2 JP71.2 JP77.3 U7.8
MISO7: JP78.1 JP80.2 JP82.2 JP88.3 U8.8
MISO8: JP89.1 JP91.2 JP93.2 JP99.3 U9.8
MISO9: JP100.1 JP102.2 JP104.2 JP110.3 U10.8
MISO10: JP111.1 JP113.2 JP115.2 JP121.3 U11.8
MISO11: JP122.1 JP124.2 JP126.2 JP132.3 U12.8
MOSI: JP2.1 JP4.1 JP9.4 JP12.2 R5.2 U1.7
MOSI1: JP10.4 JP14.1 JP16.1 JP22.2 R10.2 U2.7
MOSI2: JP23.4 JP25.1 JP27.1 JP33.2 R15.2 U3.7
MOSI3: JP34.4 JP36.1 JP38.1 JP44.2 R20.2 U4.7
MOSI4: JP45.4 JP47.1 JP49.1 JP55.2 R25.2 U5.7
MOSI5: JP56.4 JP58.1 JP60.1 JP66.2 R30.2 U6.7
MOSI6: JP67.4 JP69.1 JP71.1 JP77.2 R35.2 U7.7
MOSI7: JP78.4 JP80.1 JP82.1 JP88.2 R40.2 U8.7
MOSI8: JP89.4 JP91.1 JP93.1 JP99.2 R45.2 U9.7
MOSI9: JP100.4 JP102.1 JP104.1 JP110.2 R50.2 U10.7
MOSI10: JP111.4 JP113.1 JP115.1 JP121.2 R55.2 U11.7
MOSI11: JP122.4 JP124.1 JP126.1 JP132.2 R60.2 U12.7
N$1: D2.1 R1.1 R3.1 X1.D-
N$2: D1.1 R2.1 X1.D+
N$3: C2.1 Q1.3 U1.3
N$4: C4.1 Q1.1 U1.2
N$5: LED1.A R5.1
N$6: D4.1 R6.1 R8.1 X2.D-
N$7: D3.1 R7.1 X2.D+
N$8: C7.1 Q2.3 U2.3
N$9: C8.1 Q2.1 U2.2
N$10: LED2.A R10.1
N$11: D6.1 R11.1 R13.1 X3.D-
N$12: D5.1 R12.1 X3.D+
N$13: C11.1 Q3.3 U3.3
N$14: C12.1 Q3.1 U3.2
N$15: LED3.A R15.1
N$16: D8.1 R16.1 R18.1 X4.D-
N$17: D7.1 R17.1 X4.D+
N$18: C15.1 Q4.3 U4.3
N$19: C16.1 Q4.1 U4.2
N$20: LED4.A R20.1
N$21: D10.1 R21.1 R23.1 X5.D-
N$22: D9.1 R22.1 X5.D+
N$23: C19.1 Q5.3 U5.3
N$24: C20.1 Q5.1 U5.2
N$25: LED5.A R25.1
N$26: D12.1 R26.1 R28.1 X6.D-
N$27: D11.1 R27.1 X6.D+
N$28: C23.1 Q6.3 U6.3
N$29: C24.1 Q6.1 U6.2
N$30: LED6.A R30.1
N$31: D14.1 R31.1 R33.1 X7.D-
N$32: D13.1 R32.1 X7.D+
N$33: C27.1 Q7.3 U7.3
N$34: C28.1 Q7.1 U7.2
N$35: LED7.A R35.1
N$36: D16.1 R36.1 R38.1 X8.D-
N$37: D15.1 R37.1 X8.D+
N$38: C31.1 Q8.3 U8.3
N$39: C32.1 Q8.1 U8.2
N$40: LED8.A R40.1
N$41: D18.1 R41.1 R43.1 X9.D-
N$42: D17.1 R42.1 X9.D+
N$43: C35.1 Q9.3 U9.3
N$44: C36.1 Q9.1 U9.2
N$45: LED9.A R45.1
N$46: D20.1 R46.1 R48.1 X10.D-
N$47: D19.1 R47.1 X10.D+
N$48: C39.1 Q10.3 U10.3
N$49: C40.1 Q10.1 U10.2
N$50: LED10.A R50.1
N$51: D22.1 R51.1 R53.1 X11.D-
N$52: D21.1 R52.1 X11.D+
N$53: C43.1 Q11.3 U11.3
N$54: C44.1 Q11.1 U11.2
N$55: LED11.A R55.1
N$56: D24.1 R56.1 R58.1 X12.D-
N$57: D23.1 R57.1 X12.D+
N$58: C47.1 Q12.3 U12.3
N$59: C48.1 Q12.1 U12.2
N$60: LED12.A R60.1
RESET: R4.1 SJ1.1 TP1.P$1 U1.4
RESET1: R9.1 SJ4.1 TP2.P$1 U2.4
RESET2: R14.1 SJ6.1 TP3.P$1 U3.4
RESET3: R19.1 SJ8.1 TP4.P$1 U4.4
RESET4: R24.1 SJ10.1 TP5.P$1 U5.4
RESET5: R29.1 SJ12.1 TP6.P$1 U6.4
RESET6: R34.1 SJ14.1 TP7.P$1 U7.4
RESET7: R39.1 SJ16.1 TP8.P$1 U8.4
RESET8: R44.1 SJ18.1 TP9.P$1 U9.4
RESET9: R49.1 SJ20.1 TP10.P$1 U10.4
RESET10: R54.1 SJ22.1 TP11.P$1 U11.4
RESET11: R59.1 SJ24.1 TP12.P$1 U12.4
RST: JP1.1 JP3.1 JP9.5 JP12.1 SJ1.2 U1.10
RST1: JP10.5 JP13.1 JP15.1 JP22.1 SJ4.2 U2.10
RST2: JP23.5 JP24.1 JP26.1 JP33.1 SJ6.2 U3.10
RST3: JP34.5 JP35.1 JP37.1 JP44.1 SJ8.2 U4.10
RST4: JP45.5 JP46.1 JP48.1 JP55.1 SJ10.2 U5.10
RST5: JP56.5 JP57.1 JP59.1 JP66.1 SJ12.2 U6.10
RST6: JP67.5 JP68.1 JP70.1 JP77.1 SJ14.2 U7.10
RST7: JP78.5 JP79.1 JP81.1 JP88.1 SJ16.2 U8.10
RST8: JP89.5 JP90.1 JP92.1 JP99.1 SJ18.2 U9.10
RST9: JP100.5 JP101.1 JP103.1 JP110.1 SJ20.2 U10.10
RST10: JP111.5 JP112.1 JP114.1 JP121.1 SJ22.2 U11.10
RST11: JP122.5 JP123.1 JP125.1 JP132.1 SJ24.2 U12.10
SCK: JP2.3 JP4.3 JP9.3 JP12.5 U1.9
SCK1: JP10.3 JP14.3 JP16.3 JP22.5 U2.9
SCK2: JP23.3 JP25.3 JP27.3 JP33.5 U3.9
SCK3: JP34.3 JP36.3 JP38.3 JP44.5 U4.9
SCK4: JP45.3 JP47.3 JP49.3 JP55.5 U5.9
SCK5: JP56.3 JP58.3 JP60.3 JP66.5 U6.9
SCK6: JP67.3 JP69.3 JP71.3 JP77.5 U7.9
SCK7: JP78.3 JP80.3 JP82.3 JP88.5 U8.9
SCK8: JP89.3 JP91.3 JP93.3 JP99.5 U9.9
SCK9: JP100.3 JP102.3 JP104.3 JP110.5 U10.9
SCK10: JP111.3 JP113.3 JP115.3 JP121.5 U11.9
SCK11: JP122.3 JP124.3 JP126.3 JP132.5 U12.9
VCC: C1.1 C3.1 JP2.4 JP4.4 JP12.4 R3.2 R4.2 SJ2.1 U1.1 X1.VBUS
VCC1: C5.1 C6.1 JP14.4 JP16.4 JP22.4 R8.2 R9.2 SJ3.1 U2.1 X2.VBUS
VCC2: C9.1 C10.1 JP25.4 JP27.4 JP33.4 R13.2 R14.2 SJ5.1 U3.1 X3.VBUS
VCC3: C13.1 C14.1 JP36.4 JP38.4 JP44.4 R18.2 R19.2 SJ7.1 U4.1 X4.VBUS
VCC4: C17.1 C18.1 JP47.4 JP49.4 JP55.4 R23.2 R24.2 SJ9.1 U5.1 X5.VBUS
VCC5: C21.1 C22.1 JP58.4 JP60.4 JP66.4 R28.2 R29.2 SJ11.1 U6.1 X6.VBUS
VCC6: C25.1 C26.1 JP69.4 JP71.4 JP77.4 R33.2 R34.2 SJ13.1 U7.1 X7.VBUS
VCC7: C29.1 C30.1 JP80.4 JP82.4 JP88.4 R38.2 R39.2 SJ15.1 U8.1 X8.VBUS
VCC8: C33.1 C34.1 JP91.4 JP93.4 JP99.4 R43.2 R44.2 SJ17.1 U9.1 X9.VBUS
VCC9: C37.1 C38.1 JP102.4 JP104.4 JP110.4 R48.2 R49.2 SJ19.1 U10.1 X10.VBUS
VCC10: C41.1 C42.1 JP113.4 JP115.4 JP121.4 R53.2 R54.2 SJ21.1 U11.1 X11.VBUS
VCC11: C45.1 C46.1 JP124.4 JP126.4 JP132.4 R58.2 R59.2 SJ23.1 U12.1 X12.VBUS
VCC': JP9.2 SJ2.2
VCC'1: JP10.2 SJ3.2
VCC'2: JP23.2 SJ5.2
VCC'3: JP34.2 SJ7.2
VCC'4: JP45.2 SJ9.2
VCC'5: JP56.2 SJ11.2
VCC'6: JP67.2 SJ13.2
VCC'7: JP78.2 SJ15.2
VCC'8: JP89.2 SJ17.2
VCC'9: JP100.2 SJ19.2
VCC'10: JP111.2 SJ21.2
VCC'11: JP122.2 SJ23.2